# EAGLE board acs712_clone_2 (EAGLE 7.2.0)
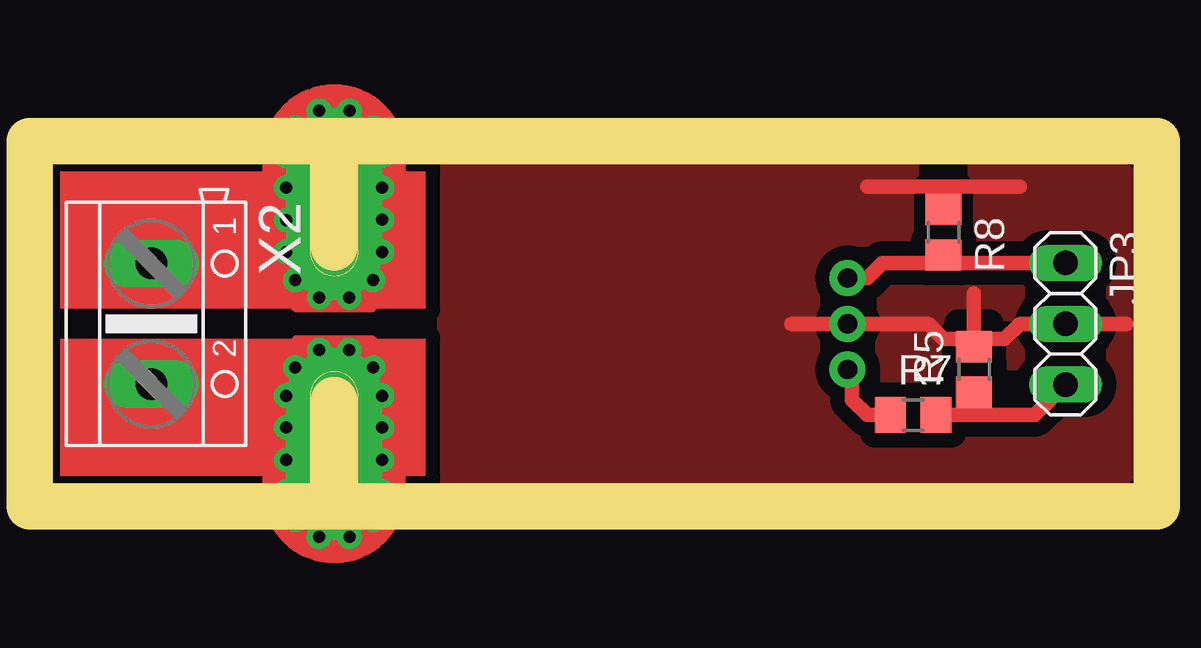
[diagram p0: board, top side]
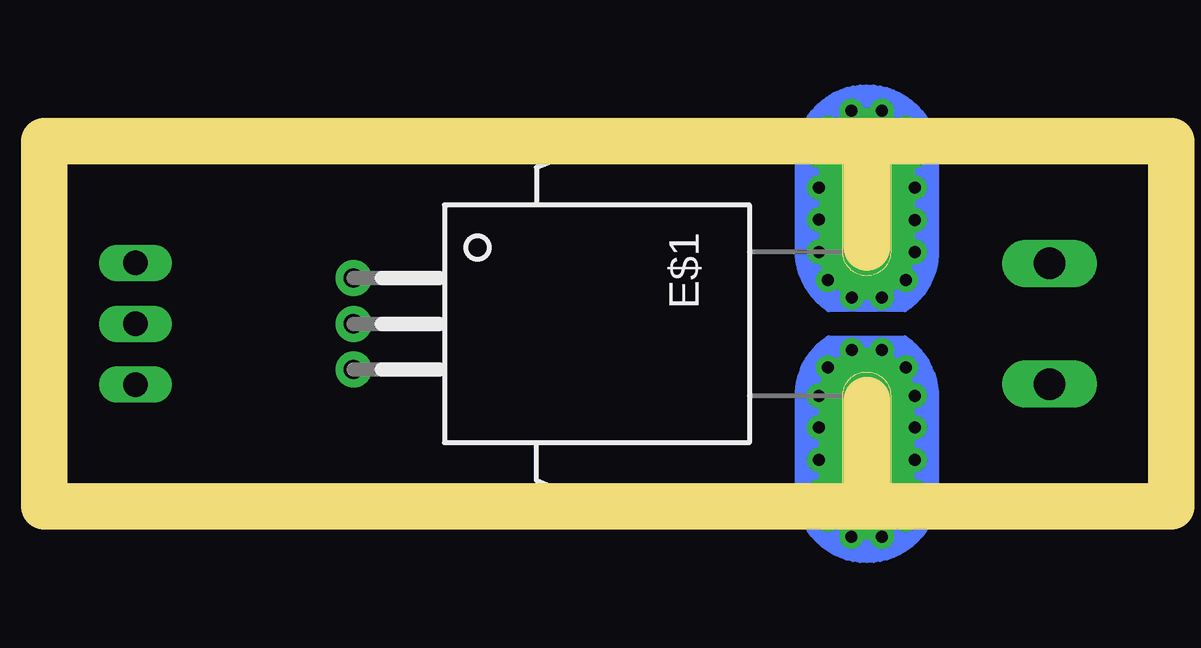
[diagram p1: board, bottom side, seen from below]

No outline drawn. Coordinates in mm, seen from the top.
Copper layers (1*16): Top 0.035mm / dielectric 1.5mm / Bottom 0.035mm
Design rules "default": minimum track width 10mil, minimum drill 24mil, track to track 8mil, track to pad 8mil, pad to pad 8mil, via to via 8mil, smd to smd 8mil, copper to edge 40mil, drill to drill 8mil, minimum pad ring 10mil, minimum via ring 8mil, stop-mask expansion 4mil, vias tented up to drill 0mil, thermal gap 10mil
tRestrict: area 40,8.3 to 41.3,10.2; area 38.7,14 to 40,15.9; area 43.2,9.5 to 45.7,10.8
Milling: 8 lines

## Footprints (pad centres in the part's own frame; a part is rotated, then mirrored left to right if it is on the bottom)
ACS75050 = drill 0.8 pad 1.5: 1 -1.91,-21.4; 2 0,-21.4; 3 1.91,-21.4 | drill 2 pad 4 offset: IP+ 7,0; IP- -7,0 | drill 0.5 pad 0.9: IP+@2 8.89,-0.635; IP+@3 8.89,0.635; IP+@4 8.175,1.625; IP+@5 7,2; IP+@6 5.675,2; IP+@7 4.325,2; IP+@8 3,2; IP+@9 1.825,1.625; IP+@10 1.1,0.625; IP+@11 1.1,-0.625; IP+@12 1.825,-1.625; IP+@13 3,-2; IP+@14 4.325,-2; IP+@15 5.675,-2; IP+@16 7,-2; IP+@17 8.175,-1.625; IP-@2 -8.89,-0.635; IP-@3 -8.89,0.635; IP-@4 -8.175,1.625; IP-@5 -7,2; IP-@6 -5.675,2; IP-@7 -4.325,2; IP-@8 -3,2; IP-@9 -1.825,1.625; IP-@10 -1.1,0.625; IP-@11 -1.1,-0.625; IP-@12 -1.825,-1.625; IP-@13 -3,-2; IP-@14 -4.35,-2; IP-@15 -5.675,-2; IP-@16 -7,-2; IP-@17 -8.175,-1.625
1X03 = drill 1.016 long: 1 -2.54,0; 2 0,0; 3 2.54,0
R0805 = smd 1.3 x 1.5: 1 -0.95,0; 2 0.95,0
AK500/2 = drill 1.321 long: 1 -2.515,0; 2 2.515,0

## Placement (x,y rotation side)
E$1  [ACS75050]  13.97,10.16 270 bottom
JP3  [1X03]  44.45,10.16 270 top
R5  [R0805]  40.64,8.26 90 top
R7  [R0805]  38.1,6.35 0 top
R8  [R0805]  39.37,13.97 270 top
X2  [AK500/2]  6.35,10.16 270 top

## Library data of the parts
E$1 = allegro
JP3 = pinhead
R5 R7 R8 = resistor
X2 = con-ptr500; OC_FARNELL: unknown; OC_NEWARK: unknown

## Nets
GND1: R8.1
IP+1: X2.1
IP-1: X2.2
N$10: R7.1
S$1: JP3.1

## Tracks (layer width: path | path; a pad name or v marks a point on that pad's centre or on a via)
GND1
  Top 0.406: 36.2,15.88 39.37,15.88 R8.1
  Top 0.61: 36.2,15.88 42.55,15.88 | 33.02,10.16 38.73,10.16 39.37,9.53 40.64,9.53 | 40.64,9.53 41.91,9.53 42.55,10.16 46.99,10.16 | 40.64,9.53 40.64,11.43
  pour Top (isolate 0.6): 46.99,3.81 46.99,16.51 2.54,16.51 2.54,3.81
S$1
  Top 0.61: JP3.1 36.83,12.7 36.2,12.06 35.56,12.06
S$5
  Top 0.61: 35.56,8.26 35.56,6.99 36.2,6.35 36.83,6.35
S$6
  Top 0.61: 39.37,6.35 43.18,6.35 43.81,6.99 43.81,7.62
(copper drawn outside any net)
  shapes: Top area x2